# Altium PCB Thingy91_Nowi_Plugin.PcbDoc
Units mm, origin at the board's own origin, x right, y up, seen from the top; angles counter-clockwise.
Board outline 50.8 x 50.4 mm, 2 copper layers (Top Layer, Bottom Layer); 13 components, 8 nets, 44 pads, 5 vias.
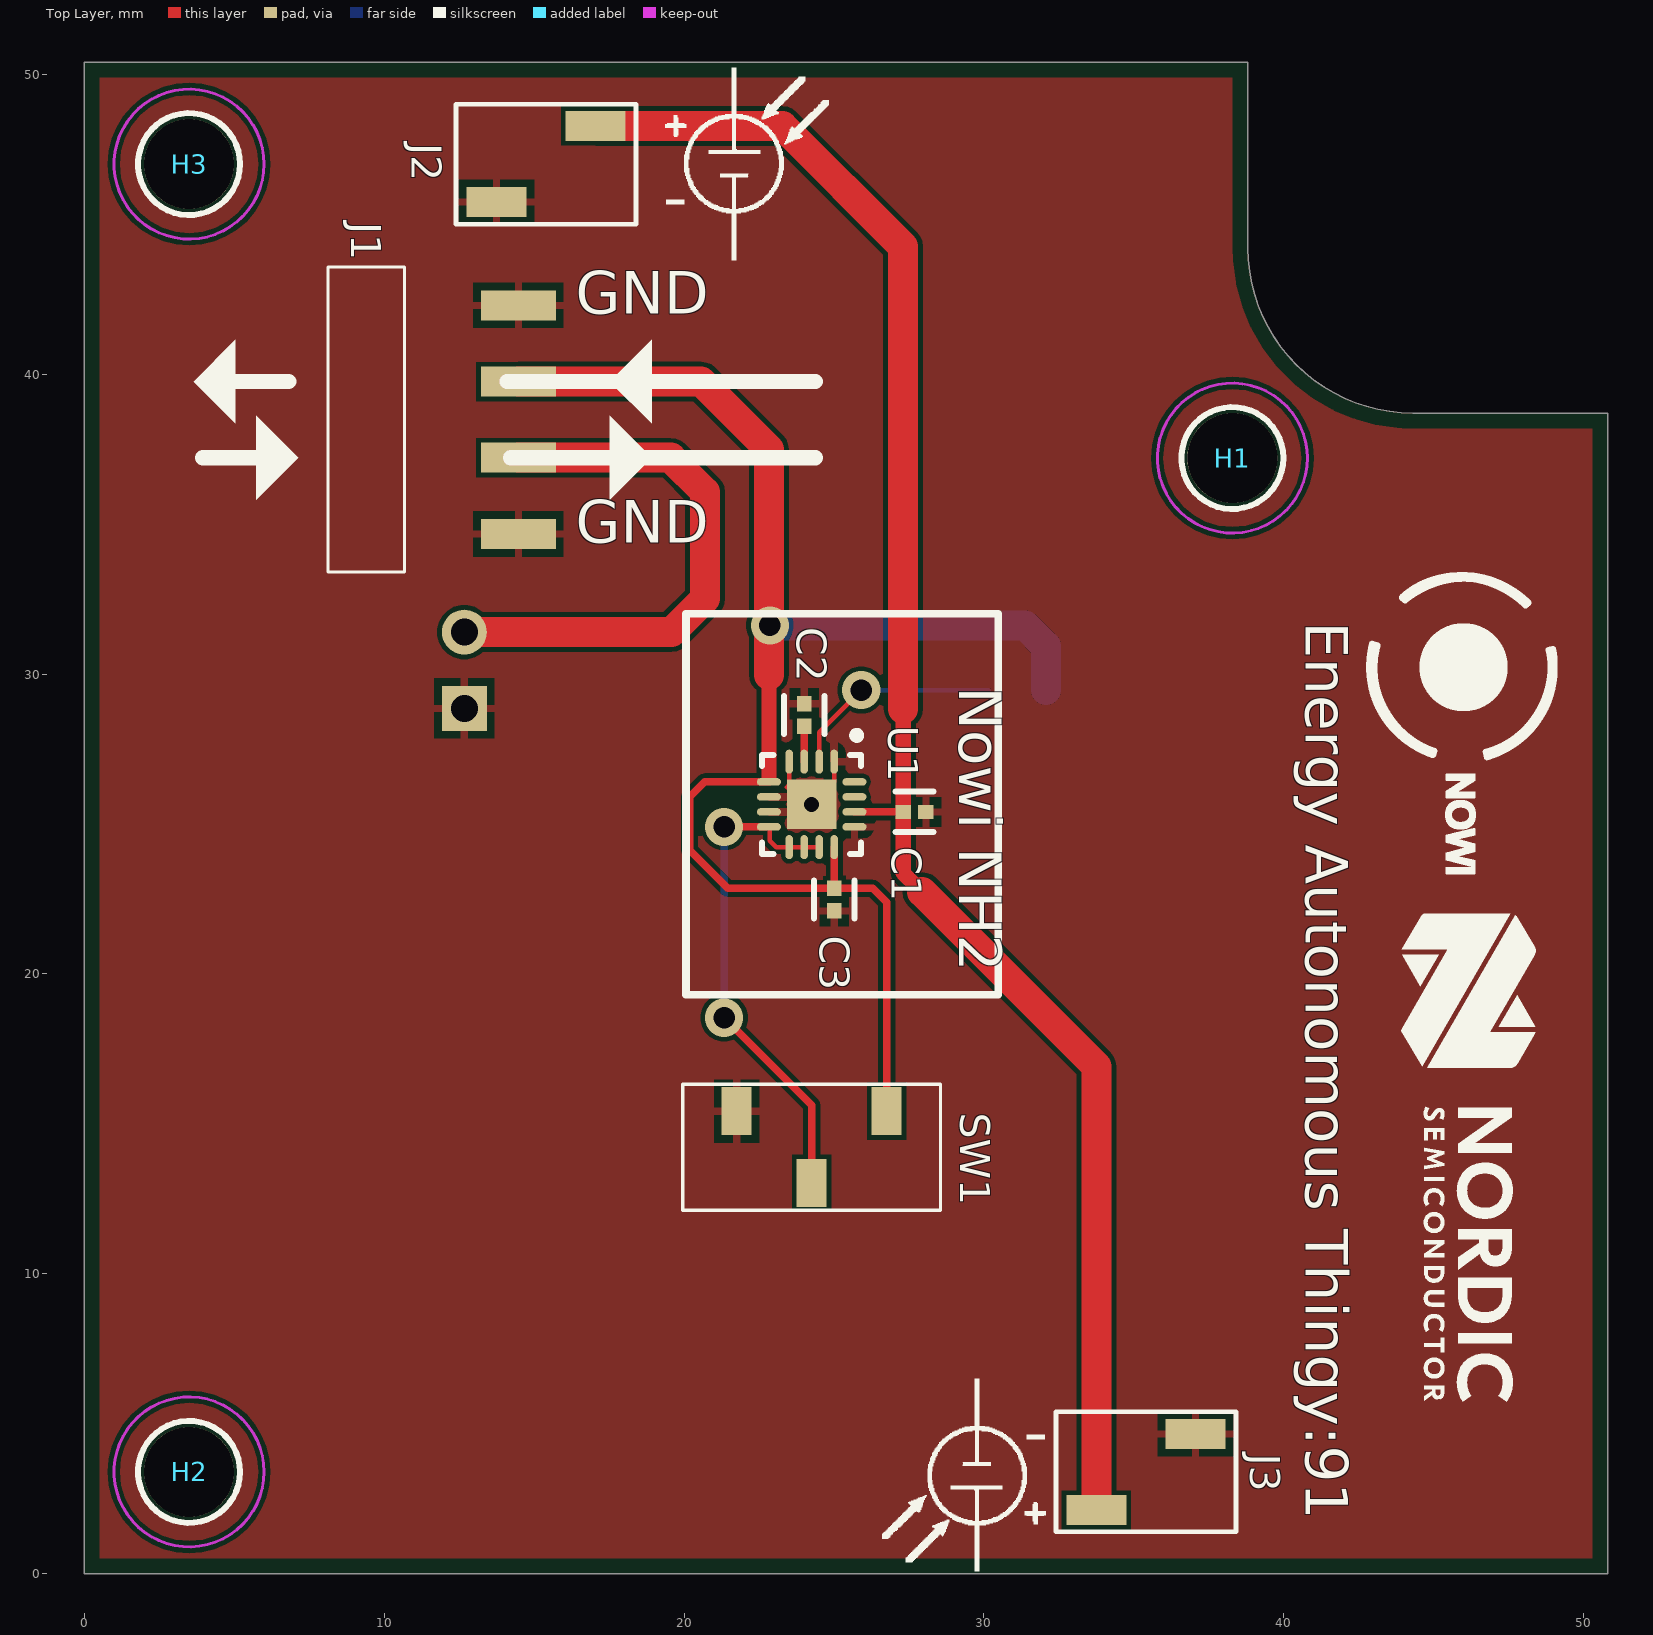
[diagram p0: Top Layer view]
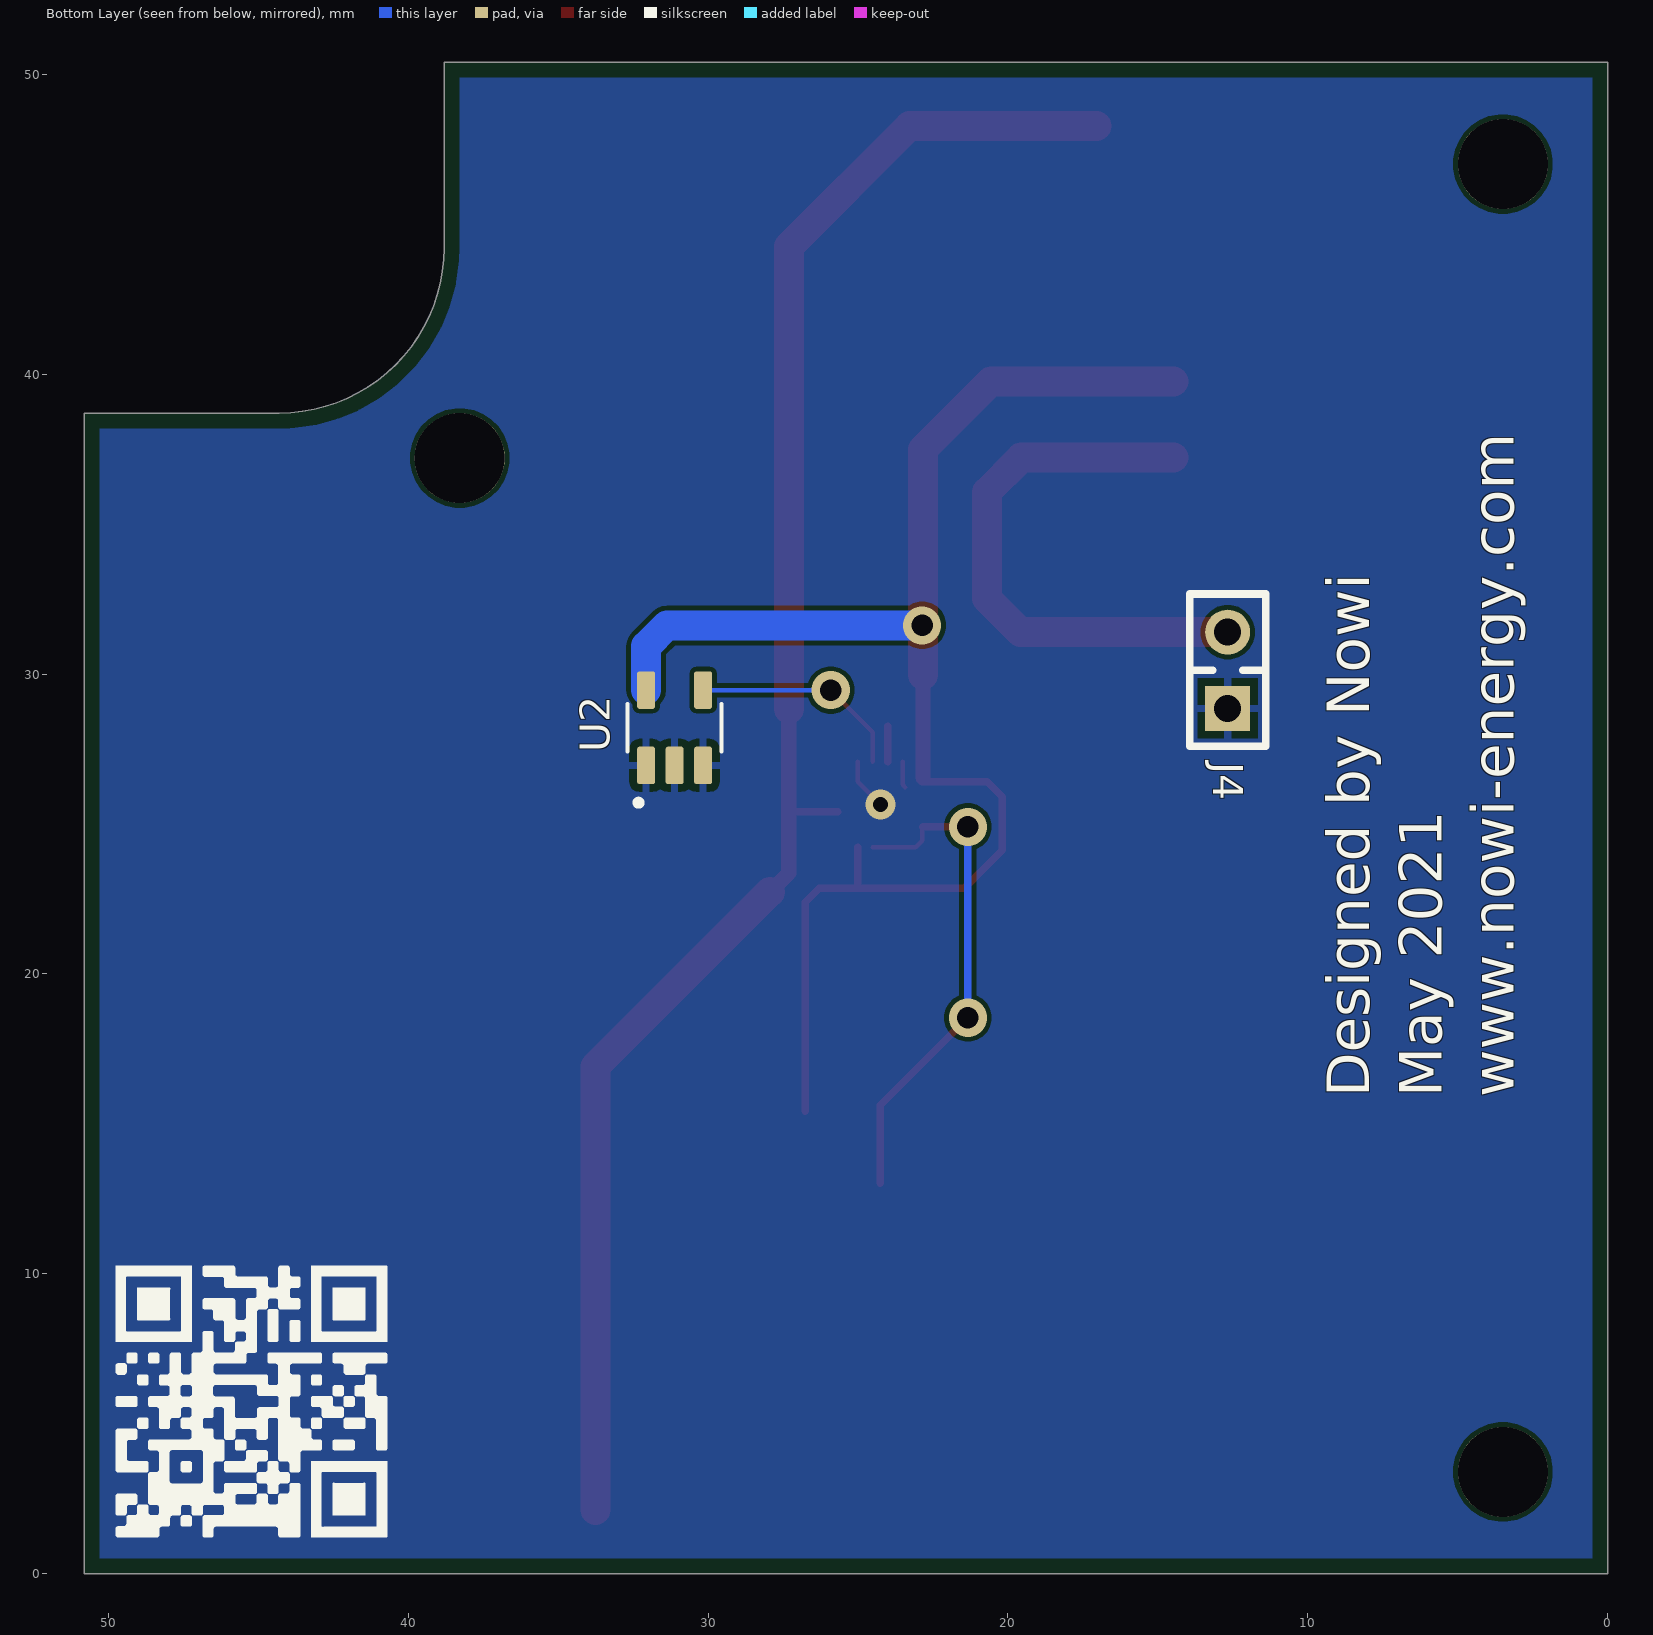
[diagram p1: Bottom Layer view, seen from below]
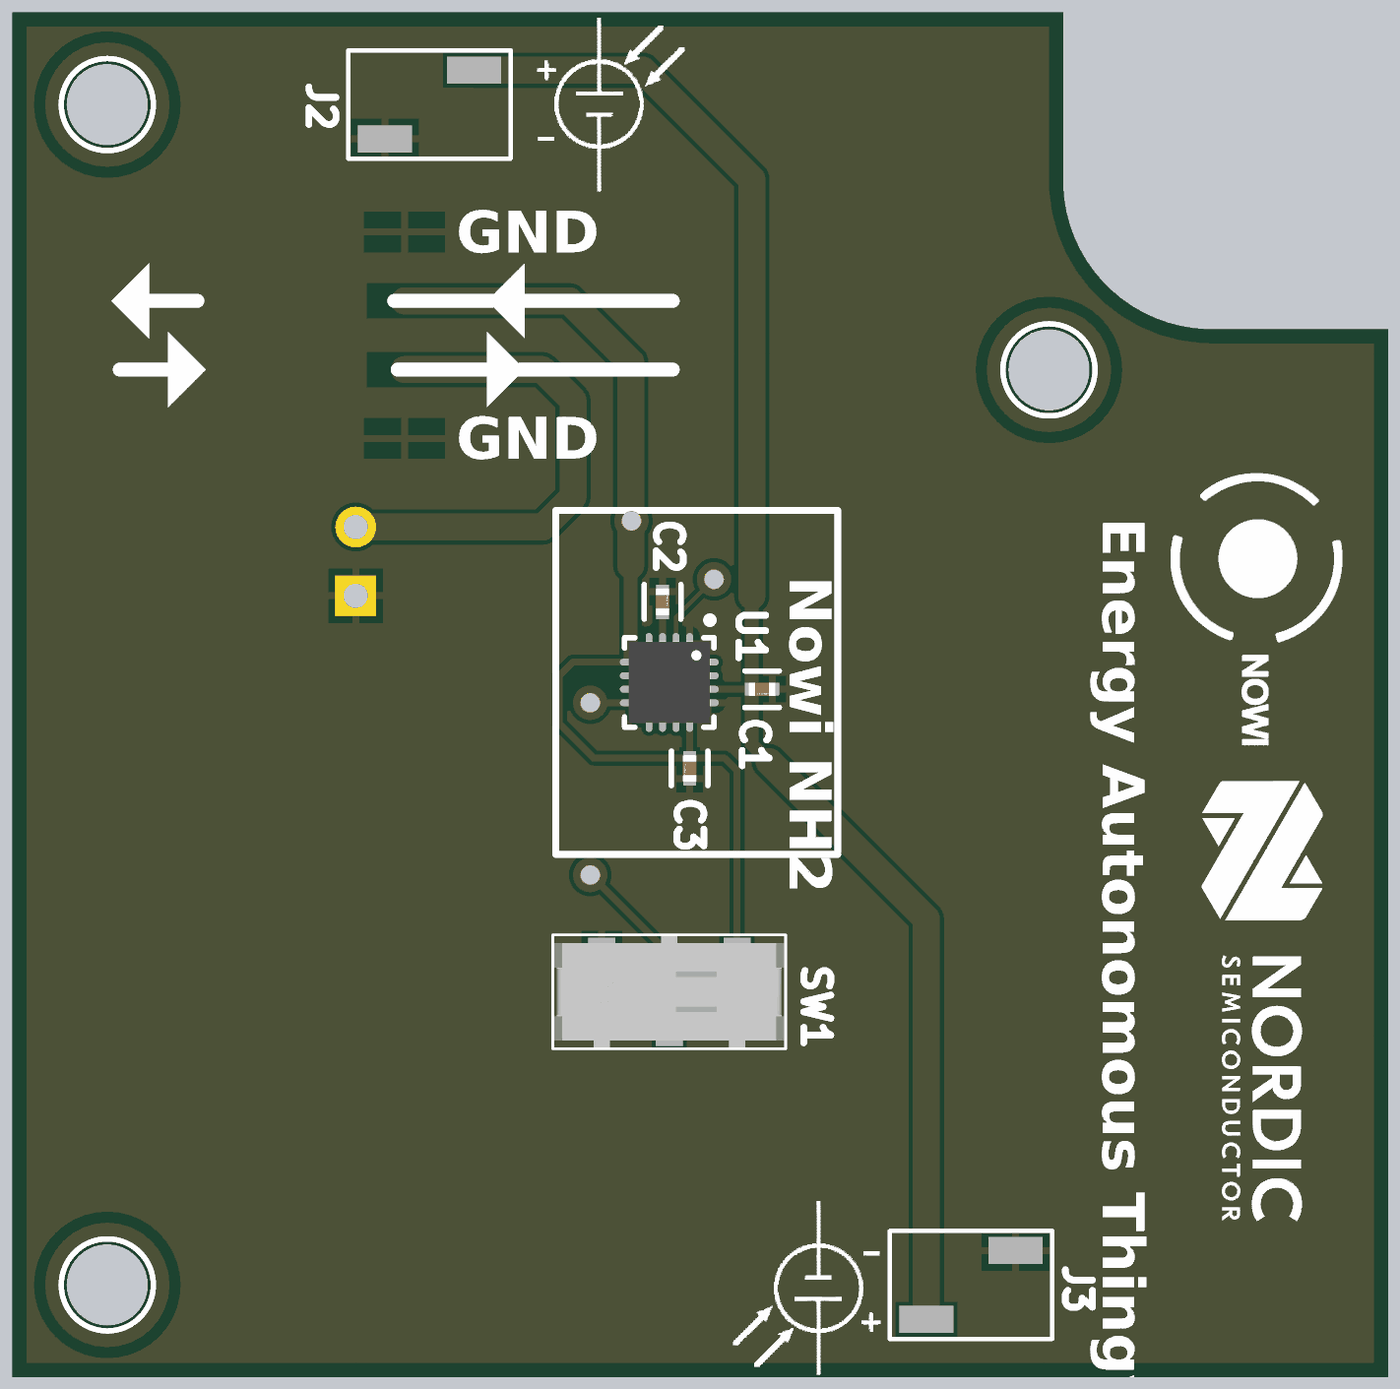
[diagram p2: 3D render of the assembled board from above, using the file's embedded part models]

## Layer stack, top to bottom
Top Solder: solder mask 0.0102, Solder Resist, Dk 3.5
Top Layer: signal copper 0.0356
Dielectric 1: dielectric 0.32, FR-4, Dk 4.8
Bottom Layer: signal copper 0.0356
Bottom Solder: solder mask 0.0102, Solder Resist, Dk 3.5

## Board outline
0,0 50.8,0 50.8,38.7 44.3,38.7 cw(c44.3,44.2) 38.8,44.2 38.8,50.4 0,50.4

## Design rules (kind name [scope] priority, off if disabled: settings)
BoardOutlineClearance [All] p1: gap=0.512 ignorepadtopadclearanceinfootprint=FALSE except(0: Arc-SplitContinuation Track-SplitContinuation SMDPad-SplitContinuation THPad-SplitContinuation Via-SplitContinuation Fill-SplitContinuation Poly-SplitContinuation Region-SplitContinuation Text-SplitContinuation)
Clearance [All] p1: gap=0.15 ignorepadtopadclearanceinfootprint=FALSE except(0: Arc-Hole Track-Hole SMDPad-Hole THPad-Hole Via-Hole Fill-Hole Poly-Hole Region-Hole Text-Hole)
MatchedLengths MatchLengths_xSignals_U201_J204 [InxSignalClass('xSignals_U201_J204_MatchLengthsClass')] p1: tolerance=2.54 checknetsindiffpair=FALSE checkdiffpairvsdiffpair=TRUE checkxsignals=TRUE checkothers=TRUE
PlaneConnect [All] p1: planeconnectstyle=Direct reliefexpansion=0.508 reliefentries=4 reliefconductorwidth=0.254 reliefairgap=0.254
PolygonConnect [All] p1: connectstyle=Direct reliefconductorwidth=0.254 reliefentries=4 polygonreliefangle="90 Angle" airgapwidth=0.254
RoutingVias [All] p1: holewidth=0.711 width=1.27 viastyle="Through Hole" minholewidth=0.711 minwidth=1.27 maxholewidth=0.711 maxwidth=1.27
SolderMaskExpansion SolderMaskExpansion_1 [(InNet('GND') AND InComponent('U101'))] p1: expansion=0.102 istentingtop=FALSE
SolderMaskExpansion [(IsVia AND (InNet('GND') OR InNet('VBAT') OR InNet('VBAT-B') or InNet('DCIN-A') or InNet('DCIN-B') or InNet('3V3') or InNet('VDD-B') or InNet('VDD_GPIO-B') or InNet('INT') or InNet('PWM') or InNet('POROut') or InNet('SYSRDY')) )] p2: expansion=0.102 istentingtop=TRUE useseparateexpansions=TRUE expansionbottom=0.102 istentingbottom=TRUE
Width [All] p1: maxlimit=2 minlimit=0.127 preferedwidth=0.154 minimp=50.000000 maximp=50.000000 favimp=50.000000
29 further rules are at their usual default settings.

## Classes and differential pairs
component class Thingy91_Nowi_Plugin: C1 C2 C3 J2 J3 J4 SW1 U1 U2

## Components (designator, comment, footprint, x,y, rotation, side; value= is the part's Value field where it differs from the comment)
C1 "5.6 nF" FP-CL842-IPC_C 27.684,25.404 r0 top value=5.6nF
C2 "2.2 µF" FP-CL127-IPC_C 24.007,28.632 r90 top value=2.2µF
C3 "2.2 µF" FP-CL127-IPC_C 25.007,22.481 r270 top
H1 "3mm,N.P" HOLE_NP_3MM 38.28,37.2 r180 top locked
H2 "3mm,N.P" HOLE_NP_3MM 3.5,3.4 r0 top
H3 "3mm,N.P" HOLE_NP_3MM 3.5,47 r270 top
J1 "Component_1" M208900405 -1261.067,1308.481 r90 top (schematic designator J2000)
J2 "NPPC021KFXC-RC" PCBComponent_1#1 15.4,47 r270 top
J3 "NPPC021KFXC-RC" PCBComponent_1#1 35.4,3.4 r90 top
J4 "Pin List 1x2" LIST_1x2-NC 12.675,30.126 r90 bottom
SW1 "JS102011JCQN" JS102011JCQN 24.257,14.224 r180 top
U1 "NH2D0245" PCBComponent_1#2 24.257,25.654 r270 top
U2 "BD46421G-TR" SOT95P280X110-5N 31.115,28.209 r90 bottom

## Footprints (in the part's own frame and the unit in brackets; to place one, negate y for a bottom-side part, rotate by r counter-clockwise, add the part's x,y. Pads: shape width x height; smd on the part's side, far side on the other; paste and mask are expansions set on the pad)
FP-CL127-IPC_C [mm]
  rect 0.515x0.472 smd paste+0 mask+0: 1(-0.379,0) 2(0.379,0)
  silkscreen extent -0.64,-0.67 0.64,0.67, body extent -0.74,-0.38 0.74,0.38, height 0.25
FP-CL842-IPC_C [mm]
  rect 0.515x0.472 smd paste+0 mask+0: 1(-0.379,0) 2(0.379,0)
  silkscreen extent -0.64,-0.67 0.64,0.67, body extent -0.74,-0.38 0.74,0.38, height 0.25
HOLE_NP_3MM [mm] "Regular 3mm non-plated hole"
  round 3 hole 3 unplated paste+0 mask+0: ""(0,0)
  silkscreen extent -1.7,-1.7 1.7,1.7
JS102011JCQN [mm]
  rect 1x1.6 smd: 1(-2.5,-1.2) 2(0,1.2) 3(2.5,-1.2)
  silkscreen extent -4.3,-2.1 4.3,2.1, body extent -4.25,-2.05 4.25,2.05, height 5.22
LIST_1x2-NC [mm] "Pin List, 2.54mm through hole"
  rect 1.5x1.5 hole 0.9: 1(-1.27,0)
  round 1.5 hole 0.9: 2(1.27,0)
  silkscreen extent -2.54,-1.27 2.54,1.27
M208900405 [mm]
  rect 1x2.5 smd: 1(-1273.81,-1275.545) 2(-1271.27,-1275.545) 3(-1268.73,-1275.545) 4(-1266.19,-1275.545)
  silkscreen extent -1275.08,-1271.75 -1264.92,-1269.21
PCBComponent_1#1 [mm]
  rect 1x2 smd: 1(-1.27,1.65) 2(1.27,-1.65)
  silkscreen extent -2,-3 2,3
PCBComponent_1#2 [mm]
  oval 0.8x0.25 smd: 1(-1.425,0.75) 2(-1.425,0.25) 3(-1.425,-0.25) 4(-1.425,-0.75) 9(1.425,-0.75) 10(1.425,-0.25) 11(1.425,0.25) 12(1.425,0.75)
  oval 0.25x0.8 smd: 5(-0.75,-1.425) 6(-0.25,-1.425) 7(0.25,-1.425) 8(0.75,-1.425) 13(0.75,1.425) 14(0.25,1.425) 15(-0.25,1.425) 16(-0.75,1.425)
  rect 1.65x1.65 smd: 17(0,0)
  silkscreen extent -2.42,-1.65 1.65,1.65, body extent -1.51,-1.51 1.51,1.51, height 1
SOT95P280X110-5N [mm]
  rrect25% 1.25x0.59 smd: 1(-1.255,0.95) 2(-1.255,0) 3(-1.255,-0.95) 4(1.255,-0.95) 5(1.255,0.95)
  silkscreen extent -2.6,-1.57 0.8,1.57, body extent -1.4,-1.45 1.4,1.45, height 1.1

## Part data
C1: library part CMP-13271-000455-1, "5.6nF ±10% 25V Ceramic Capacitor X7R 0402 (1005 Metric)", Capacitance=5.6nF, Case Code (Imperial)=0402, Case Code (Metric)=1005, Dielectric=X7R, Digi-Key Part Number=1276-1578-1-ND, Manufacturer="Samsung Electro-Mechanics", Manufacturer Part Number=CL05B562KA5NNNC, Max Operating Temperature=125°C, Min Operating Temperature=-55°C, Package Quantity=1, Tolerance=10%, Voltage=25V, Case/Package=0402, Depth=0.5mm, Height=0.5mm, Length=1mm, Mount="Surface Mount", Packaging="Tape and Reel", Radiation Hardening=No, Thickness=0.022inch, Voltage Rating=25V, Voltage Rating (DC)=25V, Width=0.02inch
C2 C3: library part CMP-13271-002909-1, "2.2µF ±20% 16V Ceramic Capacitor X5R 0402 (1005 Metric)", Capacitance=2.2uF, Case Code (Imperial)=0402, Case Code (Metric)=1005, Dielectric=X5R, Digi-Key Part Number=587-3302-1-ND, Manufacturer="Taiyo Yuden", Manufacturer Part Number=EMK105ABJ225MV-F, Max Operating Temperature=85°C, Min Operating Temperature=-55°C, Package Quantity=1, Tolerance=20%, Voltage Rating=16V, Case/Package=0402, Contact Plating=Tin, Depth=0.5mm, Height=0.5mm, Length=1mm, Mount="Surface Mount", Packaging="Tape and Reel", Radiation Hardening=No, Thickness=0.022inch, Width=0.02inch
H1 H2 H3: library part Hole_3MM_NP, "Regular Non-Plated, 3mm hole", Manufacturer="Nordic Semiconductor", Manufacturer Part Number=N.A., Artikkelnr Noca=N.A., Component Class=Connectors, ComponentLink1Description=Datasheet, ComponentLink1URL=N.A., ComponentLink2Description="Supplier link", ComponentLink2URL=N.A., Footprint Doc=Hole_3MM_NP, HelpURL=N.A., LatestRevisionDate=2009-12-12, Note="Regular Non-Plated, 3mm hole", Pad Count=1, Part Number=Hole_3MM_NP, Part number IPS=N.A., PartId=100500145, Published=2009-12-12, Supplier 1=N.A., Supplier 2=N.A., Supplier Part Number 1=N.A., Supplier Part Number 2=N.A.
J2 J3: library part Component_1, "2 Position Header, Top or Bottom Entry Connector 0.100\" (2.54mm) Surface Mount Gold", Digi-Key Part Number=S5633-ND, Manufacturer="Sullins Connector Solutions", Manufacturer Part Number=NPPC021KFXC-RC
J4: library part "Pin List 1x2, N.C.", "Pin List 1x2, 2.54mm (100mil)", Manufacturer=N.A., Artikkelnr Noca=N.A., Assembly="Not mounted", Component Class=Connectors, ComponentLink1Description=Datasheet, ComponentLink1URL=N.A., ComponentLink2Description="Supplier link", ComponentLink2URL=N.A., Footprint Doc=LIST_1x2, HelpURL=N.A., LatestRevisionDate=2017-02-02, Manufacturer Part Number=N.A., Note=N.A., Pad Count=2, Part Number="Pin List 1x2, N.C.", Part number IPS=N.A., PartId=100500298, Published=2017-01-30, Supplier 1=N.A., Supplier 2=N.A., Supplier Part Number 1=N.A., Supplier Part Number 2=N.A.
SW1: "SWITCH SLIDE SPDT 300MA 6V", Manufacturer="C&K Components", Part number IPS=00000009980, Supplier Part Number 1=CKN10721CT-ND, Artikkelnr Noca=N.A., ComponentLink1Description=Datasheet, ComponentLink2Description="Supplier link", HelpURL=http://www.ckswitches.com/media/1422/js.pdf, LatestRevisionDate=2017-02-15, Manufacturer Part Number=JS102011JCQN, Part Number=JS102011JCQN, Pin Count=3, Published=2017-02-15, Publisher="Nordic Semiconductor", Supplier 1=Digi-Key, Supplier 2=Mouser, Supplier Part Number 2=611-JS102011JCQN
U1: library part Component_1, "NH2D0245 Energy Harvesting PMIC", Digi-Key Part Number=3344-NH2D0245TR-ND, Manufacturer=Nowi, Manufacturer Part Number=NH2D0245
U2: library part Component_1

## Via types
v1: diameter 1.27, hole 0.711, Top Layer to Bottom Layer, tented both sides, 4 vias
v2: diameter 1, hole 0.5, Top Layer to Bottom Layer, 1 vias

## Nets (pads, with @x,y where several pads share a name; then routed paths per layer and width w, separated by ;. In a path a pad name is that pad's centre, name@x,y a point inside that pad or via, vN(x,y) a via of type N, cw(c..) or ccw(c..) an arc to the next point about the centre after c; other vN are vias at no path point)
DCIN: C1.1 J2.1 J3.1 U1.14 | length 58.3
  Top Layer w0.254: U1.14 C1.1
  Top Layer w0.512: 27.305,28.838 C1.1 27.305,23.368 27.94,22.733
  Top Layer w1: J2.1 23.285,48.27 27.305,44.25 27.305,28.838 ; 27.94,22.733 33.75,16.923 J3.1
GND: C1.2 C2.2 C3.2 J1.1 J1.4 J2.2 J3.2 J4.1 SW1.3 U1.1 U1.4 U1.6 U1.7 U1.13 U1.17 U2.1 U2.2 U2.3 | length 2.6
  Top Layer w0.154: 23.432,26.231 23.507,26.306 U1.4 ; v2(24.257,25.654) 25.007,26.404 U1.1
nENABLE: U1.2 U2.4 | length 7.2
  Top Layer w0.154: U1.2 24.507,28.063 v1(25.908,29.464)
  Bottom Layer w0.154: v1(25.908,29.464) U2.4
NH2_SETTING: SW1.2 U1.8 U1.9 U1.10 U1.11 | length 16.8
  Top Layer w0.154: U1.8@22.86,24.876 22.86,24.441 23.072,24.229 U1.9 U1.10 U1.11
  Top Layer w0.254: v1(21.336,18.542) 24.257,15.621 SW1.2 ; v1(21.336,24.904) U1.8
  Bottom Layer w0.254: v1(21.336,18.542) v1(21.336,24.904)
SYSRDY: U1.15
VBAT: C3.1 J1.3 SW1.1 U1.5 U1.12 U2.5 | length 51.4
  Top Layer w0.254: U1.5 20.689,26.404 20.193,25.908 20.193,24.13 21.463,22.86 C3.1 ; U1.12 C3.1 ; SW1.1 26.757,22.392 26.289,22.86 C3.1
  Top Layer w0.512: 22.832,26.538 22.832,29.972
  Top Layer w1: J1.3 20.574,39.751 22.832,37.493 22.832,29.972
  Bottom Layer w1: v1(22.86,31.623) 31.369,31.623 32.065,30.927 U2.5
"VBAT\"": J1.2 J4.2 | length 18.7
  Top Layer w1: J4.2 19.585,31.396 20.701,32.512 20.701,36.068 19.558,37.211 J1.2
VREF: C2.1 U1.3 | length 1.2
  Top Layer w0.254: U1.3 C2.1
pads on no net: H1. H2. H3. U1.16

## Polygon pours and split planes (outlines as drawn)
GND on Bottom Layer "GND_L02_P001" (solid, pour order 1): 0,50.4 0,0 50.8,0 50.8,50.419
GND on Top Layer "GND_L01_P000" (solid, pour order 0): 0,50.4 0,0 50.8,0 50.8,50.419

## Keep-outs
Top Layer:
  circle w0.1: c3.5,3.4 r2.5
  circle w0.1: c38.28,37.2 r2.5
  circle w0.1: c3.5,47 r2.5

## Silkscreen, mask and mechanical layers (free items; w line width, h text height)
Top Overlay:
  drawing of 3924 lines, arcs and shapes, not listed
  text "GND" at 16.383,41.536 h2.41
  text "GND" at 16.383,33.916 h2.41
  text "Energy Autonomous Thingy:91" at 40.259,31.75 h2.41 r270
  text "Nowi NH2" at 28.702,29.579 h2.41 r270
Bottom Overlay:
  drawing of 31 lines, arcs and shapes, not listed
  text "Designed by Nowi / May 2021 / www.nowi-energy.com" at 2.667,15.888 h2.41 r270
Mechanical 1:
  the board outline again, w0.15